# Altium PCB PCB1.PcbDoc (part 1 of 2)
Units mil, origin at the board's own origin, x right, y up, seen from the top; angles counter-clockwise.
Board outline 2920 x 2425 mil, 2 copper layers (Top Layer, Bottom Layer); 160 components, 43 nets, 660 pads, 172 vias.
Unrouted connection lines stored in the file: 5.
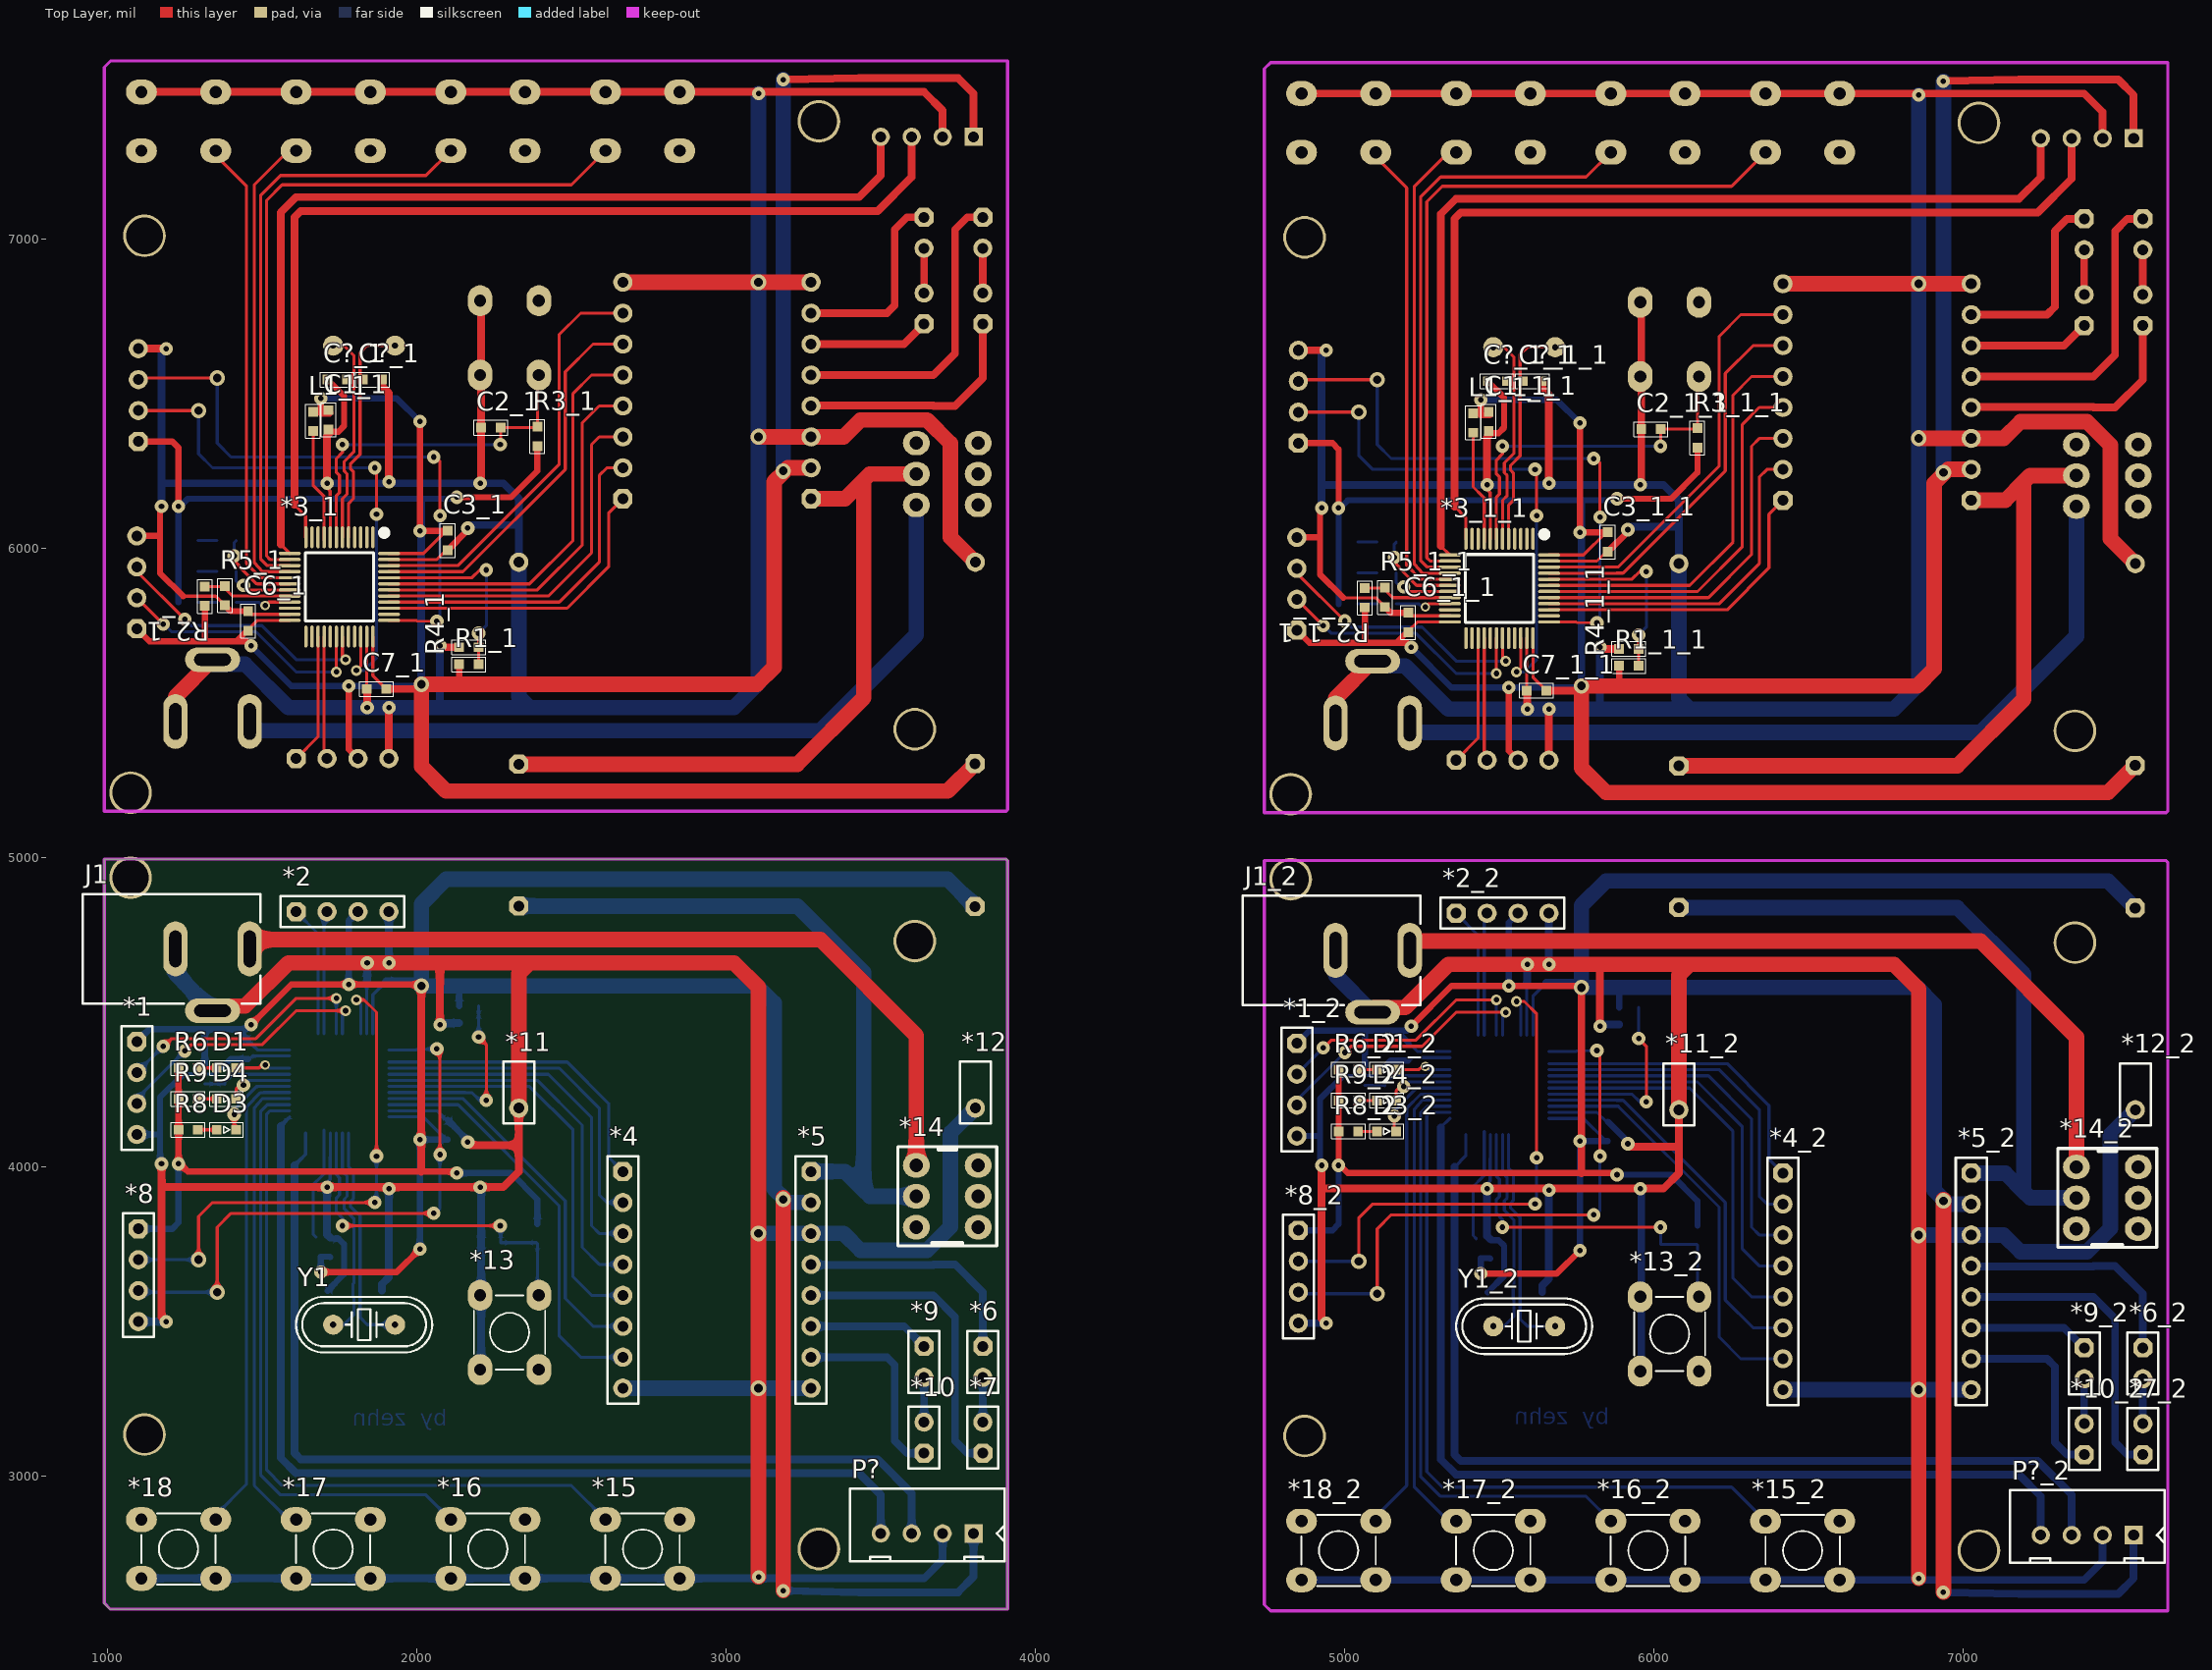
[diagram p0: Top Layer view]
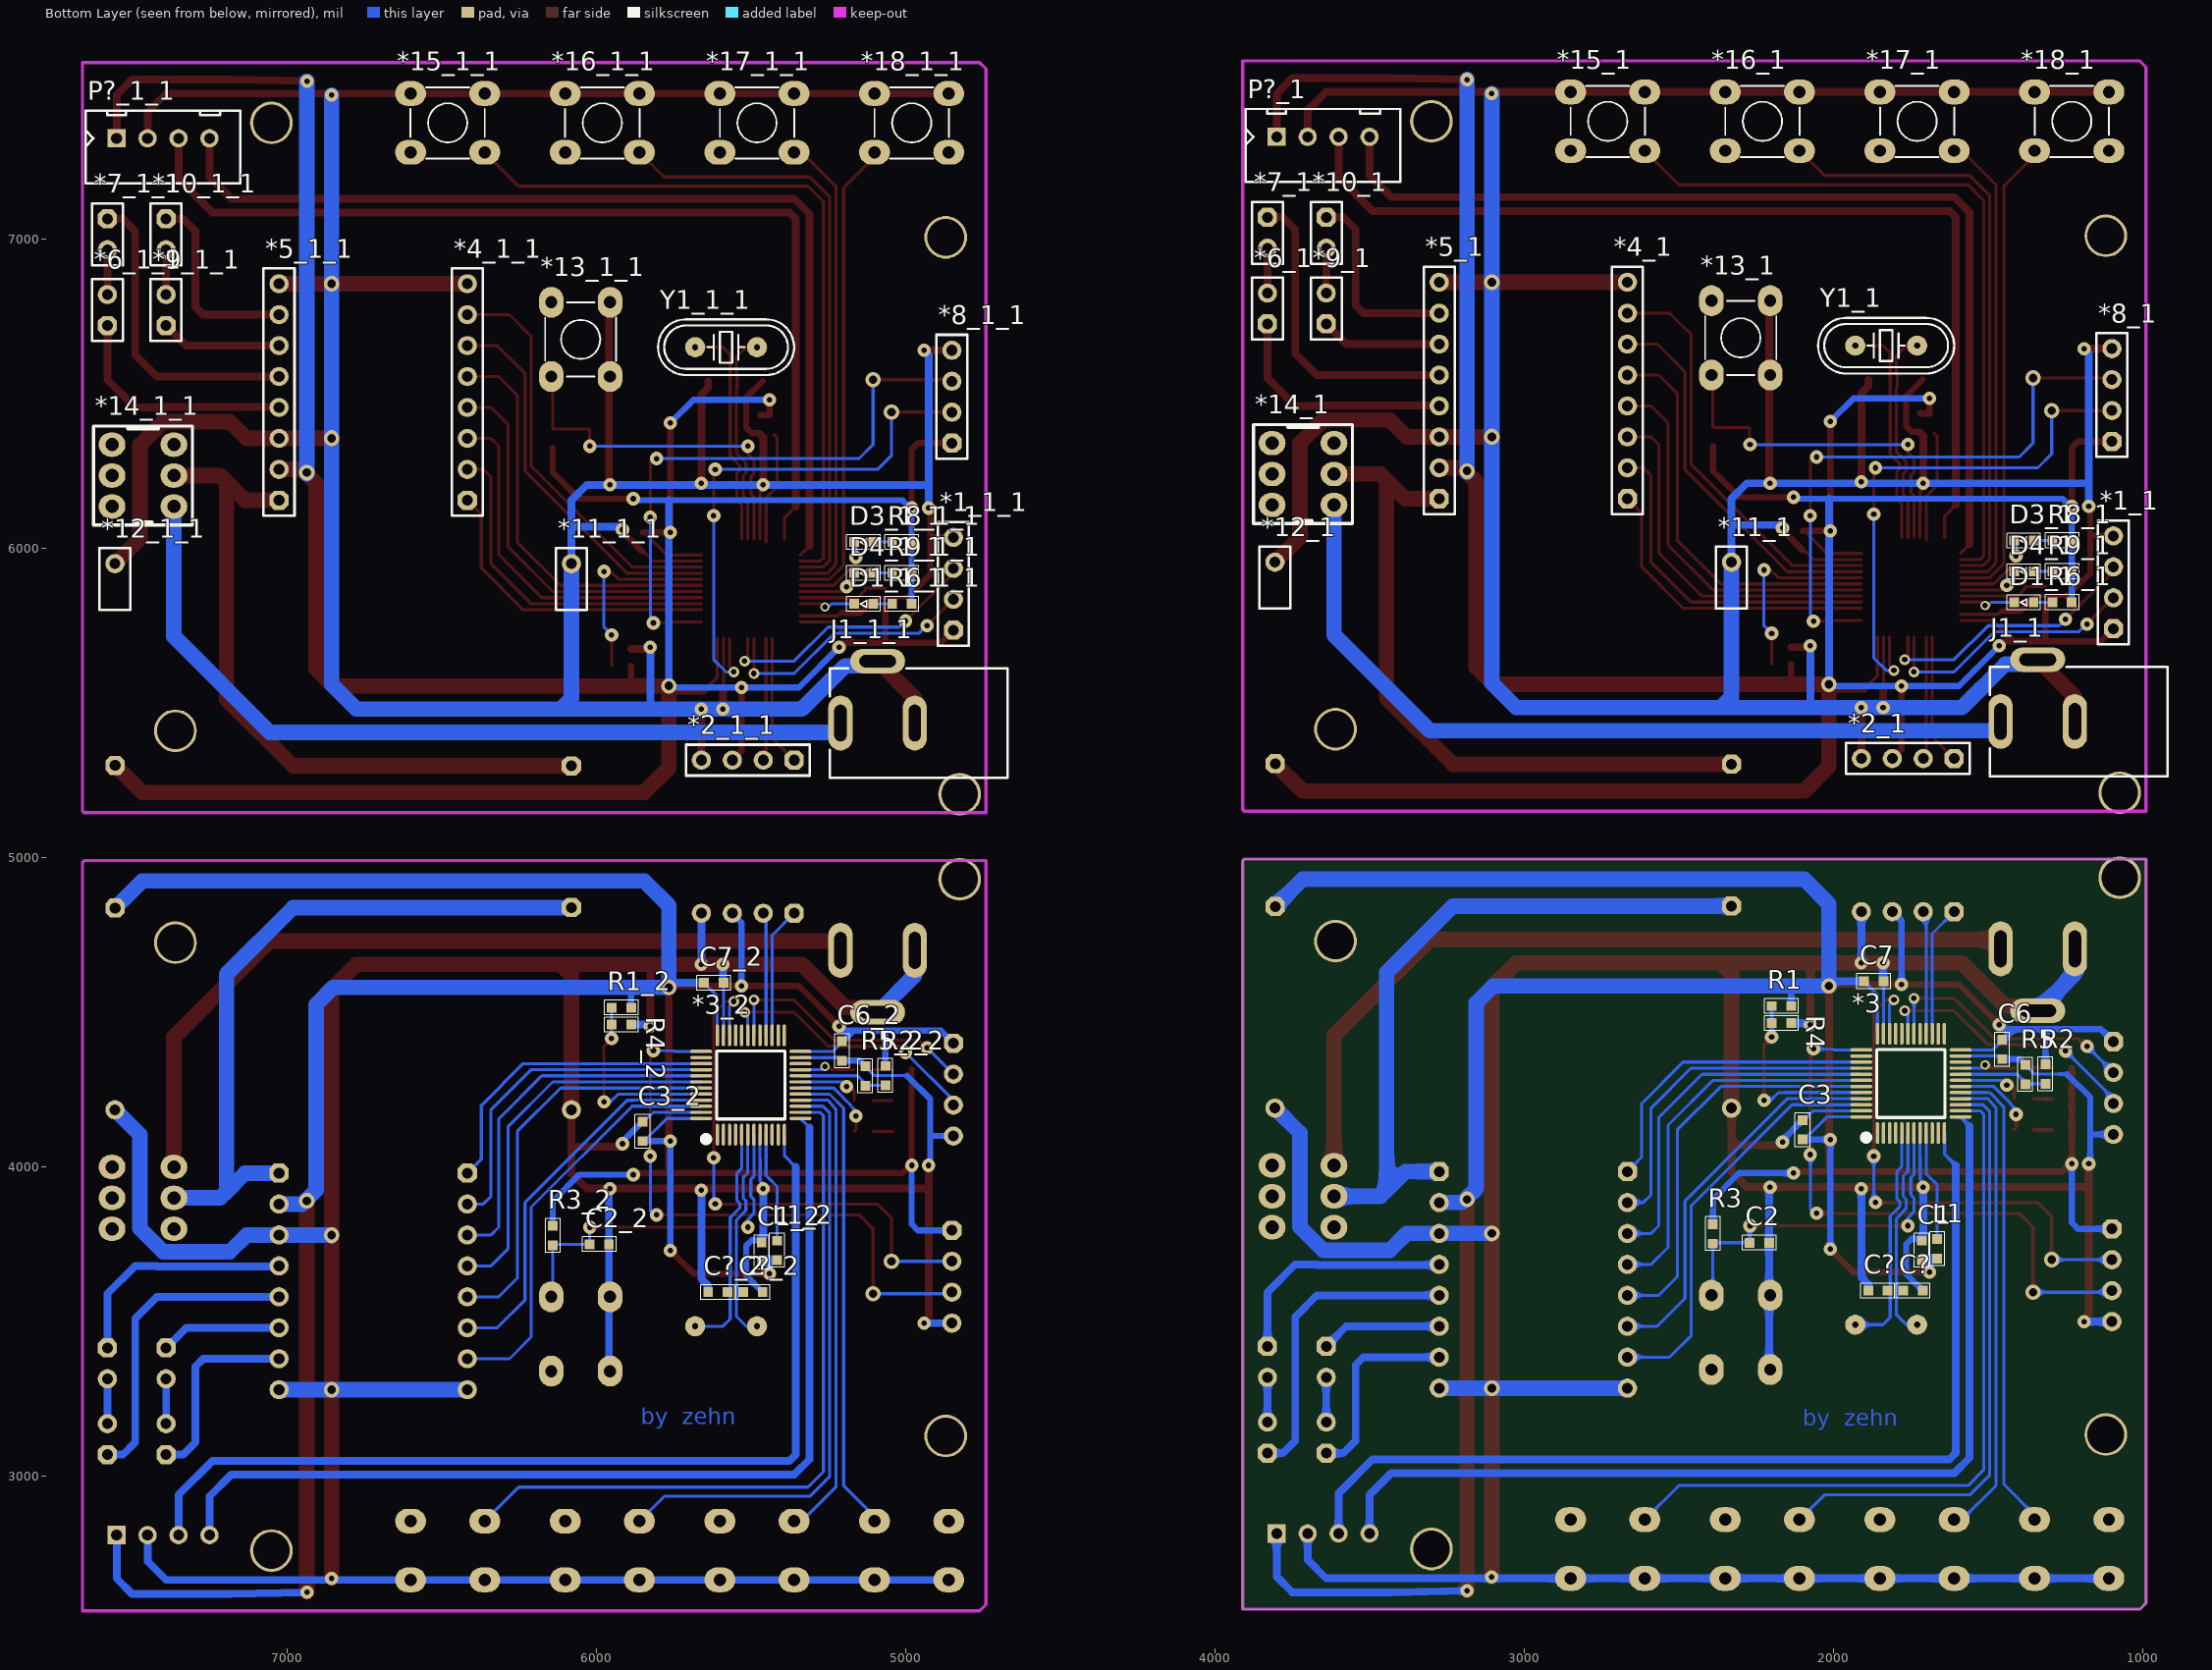
[diagram p1: Bottom Layer view, seen from below]

## Layer stack, top to bottom
Top Solder: solder mask 0.4, Solder Resist, Dk 3.5
Top Layer: signal copper 1.4
Dielectric 1: dielectric 12.6, FR-4, Dk 4.8
Bottom Layer: signal copper 1.4
Bottom Solder: solder mask 0.4, Solder Resist, Dk 3.5

## Board outline
1010,2570 990,2590 990,4995 3905,4995 3910,4990 3910,2570

## Design rules (kind name [scope] priority, off if disabled: settings)
Clearance [All] p1: gap=10 ignorepadtopadclearanceinfootprint=FALSE except(0: Arc-Hole Track-Hole SMDPad-Hole THPad-Hole Via-Hole Fill-Hole Poly-Hole Region-Hole Text-Hole)
PolygonConnect [All] p1: connectstyle=Relief reliefconductorwidth=10 reliefentries=4 polygonreliefangle="90 Angle" airgapwidth=10
RoutingVias [All] p1: holewidth=28 width=50 viastyle="Through Hole" minholewidth=28 minwidth=50 maxholewidth=28 maxwidth=50
SolderMaskExpansion [All] p1: expansion=4
Width [All] p1: maxlimit=50 minlimit=10 preferedwidth=25
30 further rules are at their usual default settings.

## Classes and differential pairs
component class Sheet1: *1 *2 *3 *4 *5 *6 *7 *8 *9 *10 *11 *12 *13 *14 *15 *16 *17 *18 C1 C2 C3 C6 C7 C? D1 D3 D4 J1 L1 P? R1 R2 R3 R4 R5 R6 R8 R9 Y1

## Components (designator, comment, footprint, x,y, rotation, side; value= is the part's Value field where it differs from the comment)
*1 "COM4-2.54" COM4-2.54 1095,4255 r270 top
*1_1 "COM4-2.54" COM4-2.54 1095,5890 r90 bottom (schematic designator *1)
*1_1_1 "COM4-2.54" COM4-2.54 4845,5885 r90 bottom (schematic designator *1)
*1_2 "COM4-2.54" COM4-2.54 4845,4250 r270 top (schematic designator *1)
*2 "COM4-2.54" COM4-2.54 1760,4825 r0 top
*2_1 "COM4-2.54" COM4-2.54 1760,5320 r0 bottom (schematic designator *2)
*2_1_1 "COM4-2.54" COM4-2.54 5510,5315 r0 bottom (schematic designator *2)
*2_2 "COM4-2.54" COM4-2.54 5510,4820 r0 top (schematic designator *2)
*3 "STM32FxxxC" LQFP48 1750,4270 r180 bottom
*3_1 "STM32FxxxC" LQFP48 1750,5875 r180 top (schematic designator *3)
*3_1_1 "STM32FxxxC" LQFP48 5500,5870 r180 top (schematic designator *3)
*3_2 "STM32FxxxC" LQFP48 5500,4265 r180 bottom (schematic designator *3)
*4 "COM8-2.54" COM8-2.54 2666.38,3635 r270 top
*4_1 "COM8-2.54" COM8-2.54 2666.38,6510 r90 bottom (schematic designator *4)
*4_1_1 "COM8-2.54" COM8-2.54 6416.38,6505 r90 bottom (schematic designator *4)
*4_2 "COM8-2.54" COM8-2.54 6416.38,3630 r270 top (schematic designator *4)
*5 "COM8-2.54" COM8-2.54 3275,3635 r270 top
*5_1 "COM8-2.54" COM8-2.54 3275,6510 r90 bottom (schematic designator *5)
*5_1_1 "COM8-2.54" COM8-2.54 7025,6505 r90 bottom (schematic designator *5)
*5_2 "COM8-2.54" COM8-2.54 7025,3630 r270 top (schematic designator *5)
*6 "COM2-2.54" COM2-2.54#1 3830,3370 r270 top
*6_1 "COM2-2.54" COM2-2.54#1 3830,6775 r90 bottom (schematic designator *6)
*6_1_1 "COM2-2.54" COM2-2.54#1 7580,6770 r90 bottom (schematic designator *6)
*6_2 "COM2-2.54" COM2-2.54#1 7580,3365 r270 top (schematic designator *6)
*7 "COM2-2.54" COM2-2.54#1 3830,3125 r90 top
*7_1 "COM2-2.54" COM2-2.54#1 3830,7020 r270 bottom (schematic designator *7)
*7_1_1 "COM2-2.54" COM2-2.54#1 7580,7015 r270 bottom (schematic designator *7)
*7_2 "COM2-2.54" COM2-2.54#1 7580,3120 r90 top (schematic designator *7)
*8 "COM4-2.54" COM4-2.54 1100,3650 r270 top
*8_1 "COM4-2.54" COM4-2.54 1100,6495 r90 bottom (schematic designator *8)
*8_1_1 "COM4-2.54" COM4-2.54 4850,6490 r90 bottom (schematic designator *8)
*8_2 "COM4-2.54" COM4-2.54 4850,3645 r270 top (schematic designator *8)
*9 "COM2-2.54" COM2-2.54#1 3640,3370 r270 top
*9_1 "COM2-2.54" COM2-2.54#1 3640,6775 r90 bottom (schematic designator *9)
*9_1_1 "COM2-2.54" COM2-2.54#1 7390,6770 r90 bottom (schematic designator *9)
*9_2 "COM2-2.54" COM2-2.54#1 7390,3365 r270 top (schematic designator *9)
*10 "COM2-2.54" COM2-2.54#1 3640,3125 r90 top
*10_1 "COM2-2.54" COM2-2.54#1 3640,7020 r270 bottom (schematic designator *10)
*10_1_1 "COM2-2.54" COM2-2.54#1 7390,7015 r270 bottom (schematic designator *10)
*10_2 "COM2-2.54" COM2-2.54#1 7390,3120 r90 top (schematic designator *10)
*11 "COM2-2.54" COM2-2.54#2 2330,4240 r270 top
*11_1 "COM2-2.54" COM2-2.54#2 2330,5905 r90 bottom (schematic designator *11)
*11_1_1 "COM2-2.54" COM2-2.54#2 6080,5900 r90 bottom (schematic designator *11)
*11_2 "COM2-2.54" COM2-2.54#2 6080,4235 r270 top (schematic designator *11)
*12 "COM2-2.54" COM2-2.54#3 3805.47,4240 r270 top
*12_1 "COM2-2.54" COM2-2.54#3 3805.47,5905 r90 bottom (schematic designator *12)
*12_1_1 "COM2-2.54" COM2-2.54#3 7555.47,5900 r90 bottom (schematic designator *12)
*12_2 "COM2-2.54" COM2-2.54#3 7555.47,4235 r270 top (schematic designator *12)
*13 "SW-PB" SW-PB1 2300,3465 r270 top
*13_1 "SW-PB" SW-PB1 2300,6680 r90 bottom (schematic designator *13)
*13_1_1 "SW-PB" SW-PB1 6050,6675 r90 bottom (schematic designator *13)
*13_2 "SW-PB" SW-PB1 6050,3460 r270 top (schematic designator *13)
*14 "SW-6" SW-6 3715,3905 r180 top
*14_1 "SW-6" SW-6 3715,6240 r180 bottom (schematic designator *14)
*14_1_1 "SW-6" SW-6 7465,6235 r180 bottom (schematic designator *14)
*14_2 "SW-6" SW-6 7465,3900 r180 top (schematic designator *14)
*15 "SW-PB" SW-PB1 2730,2765 r180 top
*15_1 "SW-PB" SW-PB1 2730,7380 r180 bottom (schematic designator *15)
*15_1_1 "SW-PB" SW-PB1 6480,7375 r180 bottom (schematic designator *15)
*15_2 "SW-PB" SW-PB1 6480,2760 r180 top (schematic designator *15)
*16 "SW-PB" SW-PB1 2230,2765 r180 top
*16_1 "SW-PB" SW-PB1 2230,7380 r180 bottom (schematic designator *16)
*16_1_1 "SW-PB" SW-PB1 5980,7375 r180 bottom (schematic designator *16)
*16_2 "SW-PB" SW-PB1 5980,2760 r180 top (schematic designator *16)
*17 "SW-PB" SW-PB1 1730,2765 r180 top
*17_1 "SW-PB" SW-PB1 1730,7380 r180 bottom (schematic designator *17)
*17_1_1 "SW-PB" SW-PB1 5480,7375 r180 bottom (schematic designator *17)
*17_2 "SW-PB" SW-PB1 5480,2760 r180 top (schematic designator *17)
*18 "SW-PB" SW-PB1 1230,2765 r180 top
*18_1 "SW-PB" SW-PB1 1230,7380 r180 bottom (schematic designator *18)
*18_1_1 "SW-PB" SW-PB1 4980,7375 r180 bottom (schematic designator *18)
*18_2 "SW-PB" SW-PB1 4980,2760 r180 top (schematic designator *18)
C1 "CAP" C_0603 1715,3730 r270 bottom
C1_1 "CAP" C_0603 1715,6415 r90 top (schematic designator C1)
C1_1_1 "CAP" C_0603 5465,6410 r90 top (schematic designator C1)
C1_2 "CAP" C_0603 5465,3725 r270 bottom (schematic designator C1)
C2 "CAP" C_0603 2240,3755 r180 bottom
C2_1 "CAP" C_0603 2240,6390 r180 top (schematic designator C2)
C2_1_1 "CAP" C_0603 5990,6385 r180 top (schematic designator C2)
C2_2 "CAP" C_0603 5990,3750 r180 bottom (schematic designator C2)
C3 "CAP" C_0603 2100,4120 r270 bottom
C3_1 "CAP" C_0603 2100,6025 r90 top (schematic designator C3)
C3_1_1 "CAP" C_0603 5850,6020 r90 top (schematic designator C3)
C3_2 "CAP" C_0603 5850,4115 r270 bottom (schematic designator C3)
C6 "CAP" C_0603 1455,4380 r90 bottom
C6_1 "CAP" C_0603 1455,5765 r270 top (schematic designator C6)
C6_1_1 "CAP" C_0603 5205,5760 r270 top (schematic designator C6)
C6_2 "CAP" C_0603 5205,4375 r90 bottom (schematic designator C6)
C7 "CAP" C_0603 1870,4600 r0 bottom
C7_1 "CAP" C_0603 1870,5545 r0 top (schematic designator C7)
C7_1_1 "CAP" C_0603 5620,5540 r0 top (schematic designator C7)
C7_2 "CAP" C_0603 5620,4595 r0 bottom (schematic designator C7)
C? "CAP" C_0603 1743.5,3600 r180 bottom
C? "CAP" C_0603 1856.5,3600 r0 bottom
C?_1 "CAP" C_0603 1856.5,6545 r0 top (schematic designator C?)
C?_1 "CAP" C_0603 1743.5,6545 r180 top (schematic designator C?)
C?_1_1 "CAP" C_0603 5493.5,6540 r180 top (schematic designator C?)
C?_1_1 "CAP" C_0603 5606.5,6540 r0 top (schematic designator C?)
C?_2 "CAP" C_0603 5606.5,3595 r0 bottom (schematic designator C?)
C?_2 "CAP" C_0603 5493.5,3595 r180 bottom (schematic designator C?)
D1 "LED" LED_0603 1385,4320 r0 top value=BLUE
D1_1 "LED" LED_0603 1385,5825 r0 bottom value=BLUE (schematic designator D1)
D1_1_1 "LED" LED_0603 5135,5820 r0 bottom value=BLUE (schematic designator D1)
D1_2 "LED" LED_0603 5135,4315 r0 top value=BLUE (schematic designator D1)
D3 "LED" LED_0603 1385,4120 r0 top value=BLUE
D3_1 "LED" LED_0603 1385,6025 r0 bottom value=BLUE (schematic designator D3)
D3_1_1 "LED" LED_0603 5135,6020 r0 bottom value=BLUE (schematic designator D3)
D3_2 "LED" LED_0603 5135,4115 r0 top value=BLUE (schematic designator D3)
D4 "LED" LED_0603 1385,4220 r0 top value=BLUE
D4_1 "LED" LED_0603 1385,5925 r0 bottom value=BLUE (schematic designator D4)
D4_1_1 "LED" LED_0603 5135,5920 r0 bottom value=BLUE (schematic designator D4)
D4_2 "LED" LED_0603 5135,4215 r0 top value=BLUE (schematic designator D4)
J1 "PWRCON" DC-005 1500,4705 r0 top
J1_1 "PWRCON" DC-005 1500,5440 r0 bottom (schematic designator J1)
J1_1_1 "PWRCON" DC-005 5250,5435 r0 bottom (schematic designator J1)
J1_2 "PWRCON" DC-005 5250,4700 r0 top (schematic designator J1)
L1 "L" L-0603 1665,3735 r270 bottom
L1_1 "L" L-0603 1665,6410 r90 top (schematic designator L1)
L1_1_1 "L" L-0603 5415,6405 r90 top (schematic designator L1)
L1_2 "L" L-0603 5415,3730 r270 bottom (schematic designator L1)
P? "Header 4" XH2.54-4P 3650,2815 r180 top
P?_1 "Header 4" XH2.54-4P 3650,7330 r180 bottom (schematic designator P?)
P?_1_1 "Header 4" XH2.54-4P 7400,7325 r180 bottom (schematic designator P?)
P?_2 "Header 4" XH2.54-4P 7400,2810 r180 top (schematic designator P?)
R1 "RES" R_0603 2168.5,4520 r180 bottom
R1_1 "RES" R_0603 2168.5,5625 r180 top (schematic designator R1)
R1_1_1 "RES" R_0603 5918.5,5620 r180 top (schematic designator R1)
R1_2 "RES" R_0603 5918.5,4515 r180 bottom (schematic designator R1)
R2 "RES" R_0603 1315,4300 r90 bottom
R2_1 "RES" R_0603 1315,5845 r270 top (schematic designator R2)
R2_1_1 "RES" R_0603 5065,5840 r270 top (schematic designator R2)
R2_2 "RES" R_0603 5065,4295 r90 bottom (schematic designator R2)
R3 "RES" R_0603 2390,3783.5 r90 bottom
R3_1 "RES" R_0603 2390,6361.5 r270 top (schematic designator R3)
R3_1_1 "RES" R_0603 6140,6356.5 r270 top (schematic designator R3)
R3_2 "RES" R_0603 6140,3778.5 r90 bottom (schematic designator R3)
R4 "RES" R_0603 2168.5,4465 r0 bottom
R4_1 "RES" R_0603 2168.5,5680 r0 top (schematic designator R4)
R4_1_1 "RES" R_0603 5918.5,5675 r0 top (schematic designator R4)
R4_2 "RES" R_0603 5918.5,4460 r0 bottom (schematic designator R4)
R5 "RES" R_0603 1380,4298.5 r270 bottom
R5_1 "RES" R_0603 1380,5846.5 r90 top (schematic designator R5)
R5_1_1 "RES" R_0603 5130,5841.5 r90 top (schematic designator R5)
R5_2 "RES" R_0603 5130,4293.5 r270 bottom (schematic designator R5)
R6 "RES" R_0603 1261.5,4320 r180 top
R6_1 "RES" R_0603 1261.5,5825 r180 bottom (schematic designator R6)
R6_1_1 "RES" R_0603 5011.5,5820 r180 bottom (schematic designator R6)
R6_2 "RES" R_0603 5011.5,4315 r180 top (schematic designator R6)
R8 "RES" R_0603 1261.5,4120 r180 top
R8_1 "RES" R_0603 1261.5,6025 r180 bottom (schematic designator R8)
R8_1_1 "RES" R_0603 5011.5,6020 r180 bottom (schematic designator R8)
R8_2 "RES" R_0603 5011.5,4115 r180 top (schematic designator R8)
R9 "RES" R_0603 1261.5,4220 r180 top
R9_1 "RES" R_0603 1261.5,5925 r180 bottom (schematic designator R9)
R9_1_1 "RES" R_0603 5011.5,5920 r180 bottom (schematic designator R9)
R9_2 "RES" R_0603 5011.5,4215 r180 top (schematic designator R9)
Y1 "XTAL_49US" XTAL_DIP 1830,3490 r0 top value=12MHz
Y1_1 "XTAL_49US" XTAL_DIP 1830,6655 r0 bottom value=12MHz (schematic designator Y1)
Y1_1_1 "XTAL_49US" XTAL_DIP 5580,6650 r0 bottom value=12MHz (schematic designator Y1)
Y1_2 "XTAL_49US" XTAL_DIP 5580,3485 r0 top value=12MHz (schematic designator Y1)

## Footprints (in the part's own frame and the unit in brackets; to place one, negate y for a bottom-side part, rotate by r counter-clockwise, add the part's x,y. Pads: shape width x height; smd on the part's side, far side on the other; paste and mask are expansions set on the pad)
C_0603 [mm]
  rect 0.8x0.8 smd: 1(-0.8,0) 2(0.8,0)
  silkscreen extent -1.38,-0.61 1.4,0.61, body extent -0.79,-0.38 0.81,0.42, height 0.5
COM2-2.54#1 [mil]
  oct 62x62 hole 35: 1(-50,0)
  round 62 hole 35: 2(50,0)
  silkscreen extent -100,-50 100,50, body extent -100,-50 100,50, height 336
COM2-2.54#2 [mil]
  oct 62x62 hole 35: 1(-603.31,0)
  round 62 hole 35: 2(50,0)
  silkscreen extent -100,-50 100,50, body extent -100,-50 100,50, height 336
COM2-2.54#3 [mil]
  oct 62x62 hole 35: 1(-601.73,-0.47)
  round 62 hole 35: 2(50,0)
  silkscreen extent -100,-50 100,50, body extent -100,-50 100,50, height 336
COM4-2.54 [mil]
  oct 62x62 hole 35: 1(-150,0)
  round 62 hole 35: 2(-50,0) 3(50,0) 4(150,0)
  silkscreen extent -200,-50 200,50, body extent -200,-50 200,50, height 398
COM8-2.54 [mil]
  oct 62x62 hole 35: 1(-350,0)
  round 62 hole 35: 2(-250,0) 3(-150,0) 4(-50,0) 5(50,0) 6(150,0) 7(250,0) 8(350,0)
  silkscreen extent -400,-50 400,50, body extent -400,-50 400,50, height 398
DC-005 [mm] "DC电源插座"
  oval 2x4.5 hole 1 slot 3 at 90 deg: 1(-1.016,0) 2(-7.112,0)
  oval 4.5x2 hole 1 slot 3 at 0 deg: 3(-4.064,-5.08)
  silkscreen extent -14.73,-4.5 -0.13,4.5, body extent -14.59,-5.01 -0.76,4.5, height 11.02
L-0603 [mm]
  rect 0.8x0.8 smd: 1(-0.8,0) 2(0.8,0)
  silkscreen extent -1.38,-0.61 1.4,0.61, body extent -0.79,-0.48 0.81,0.47, height 0.78
LED_0603 [mm]
  rect 0.8x0.8 smd: 1(-0.8,0) 2(0.8,0)
  silkscreen extent -1.38,-0.6 1.39,0.61, body extent -0.8,-0.4 0.82,0.4, height 0.6
LQFP48 [mm]
  oval 0.279x1.8 smd: 1(-2.75,-4.075) 2(-2.25,-4.075) 3(-1.75,-4.075) 4(-1.25,-4.075) 5(-0.75,-4.075) 6(-0.25,-4.075) 7(0.25,-4.075) 8(0.75,-4.075) 9(1.25,-4.075) 10(1.75,-4.075) 11(2.25,-4.075) 12(2.75,-4.075) 25(2.75,4.075) 26(2.25,4.075) 27(1.75,4.075) 28(1.25,4.075) 29(0.75,4.075) 30(0.25,4.075) 31(-0.25,4.075) 32(-0.75,4.075) 33(-1.25,4.075) 34(-1.75,4.075) 35(-2.25,4.075) 36(-2.75,4.075)
  oval 1.8x0.279 smd: 13(4.075,-2.75) 14(4.075,-2.25) 15(4.075,-1.75) 16(4.075,-1.25) 17(4.075,-0.75) 18(4.075,-0.25) 19(4.075,0.25) 20(4.075,0.75) 21(4.075,1.25) 22(4.075,1.75) 23(4.075,2.25) 24(4.075,2.75) 37(-4.075,2.75) 38(-4.075,2.25) 39(-4.075,1.75) 40(-4.075,1.25) 41(-4.075,0.75) 42(-4.075,0.25) 43(-4.075,-0.25) 44(-4.075,-0.75) 45(-4.075,-1.25) 46(-4.075,-1.75) 47(-4.075,-2.25) 48(-4.075,-2.75)
  silkscreen extent -3.93,-4.69 2.79,2.79, body extent -4.49,-4.45 4.51,4.55, height 1.56
R_0603 [mm]
  rect 0.8x0.8 smd: 1(-0.8,0) 2(0.8,0)
  silkscreen extent -1.38,-0.61 1.4,0.61, body extent -0.81,-0.42 0.83,0.43, height 0.46
SW-6 [mm]
  oval 2.2x2 hole 1.1: 1(-2.54,2.54) 2(-2.54,0) 3(-2.54,-2.54) 4(2.54,2.54) 5(2.54,0) 6(2.54,-2.54)
  silkscreen extent -4.06,-4.06 4.06,4.06, body extent -3.38,-3.41 3.62,3.59, height 13
SW-PB1 [mil]
  oval 100x80 hole 39.37: 1(-120,95) 1(120,95) 2(-120,-95) 2(120,-95)
  silkscreen extent -120,-115 120,115, body extent -157,-116 155,128, height 185
XH2.54-4P [mm] "XH2.54端子直针"
  rect 1.5x1.5 hole 0.9: 1(-3.81,0)
  round 1.5 hole 0.9: 2(-1.27,0) 3(1.27,0) 4(3.81,0)
  silkscreen extent -6.35,-3.68 6.35,2.29, body extent -6.22,-3.49 6.22,2.22, height 1.5
XTAL_DIP [mil]
  round 65 hole 20: 1(-100,0) 2(100,0)
  silkscreen extent -220,-90 220,90, body extent -210,-60 210,60, height 122

## Part data
J1 J1_1 J1_1_1 J1_2: "直流电源端子", ComponentLink1Description="Manufacturer Link", ComponentLink1URL=http://domino.kycon.com/internet/Products.html, DatasheetDocument=09-May-2002, Published=17-Dec-2003, Publisher="Altium Limited"
P? P?_1 P?_1_1 P?_2: "接插件", LatestRevisionDate=17-Jul-2002, LatestRevisionNote="Re-released for DXP Platform.", Publisher="Altium Limited"
D1 D1_1 D1_1_1 D1_2 D3 D3_1 D3_1_1 D3_2 D4 D4_1 D4_1_1 D4_2: PCB DECAL=LED_0603
Y1 Y1_1 Y1_1_1 Y1_2: PCB DECAL=XTAL_SMD

## Free pads (board coordinates)
  round 137.8 hole 118.11: 2(1075,4935) 2(1075,5210) 2(1120,3135) 2(1120,7010) 2(3300,2765) 2(3300,7380) 2(3610,4730) 2(3610,5415) 2(4825,4930) 2(4825,5205) 2(4870,3130) 2(4870,7005) 2(7050,2760) 2(7050,7375) 2(7360,4725) 2(7360,5410)

## Via types
v1: diameter 43.31, hole 17.72, Top Layer to Bottom Layer, 132 vias
v2: diameter 50, hole 28, Top Layer to Bottom Layer, 24 vias
v3: diameter 35.43, hole 17.72, Top Layer to Bottom Layer, 12 vias
v4: diameter 30.87, hole 17.72, Top Layer to Bottom Layer, 4 vias

## Nets (pads, with @x,y where several pads share a name; then routed paths per layer and width w, separated by ;. In a path a pad name is that pad's centre, name@x,y a point inside that pad or via, vN(x,y) a via of type N, cw(c..) or ccw(c..) an arc to the next point about the centre after c; other vN are vias at no path point)
3.3v: *1.1 *2.3 *3.24 *3.36 *3.48 *5.2 *8.1 *12.1 C1.2 C3.2 C6.2 C7.2 L1.2 P?.1 R1.2 R2.2 R3.2 R6.2 R8.2 R9.2 | length 11604.8
  Top Layer w20: R6.2@1230,4320 R9.2@1230,4220 R8.2@1230,4120 1230,4015 1260,3985 2015,3985 2125,3985 v1(2130,3980) ; v1(1465,4460) 1595,4590 v1(1780,4590) 2010,4590 v2(2015,4585) ; v1(1690,3660) 1935,3660 v1(2010,3735)
  Top Layer w25: 2015,3985 v2(2015,4585)
  Top Layer w50: v1(3185,2630) v1(3185,3900)
  Bottom Layer w10: C6.2@1455,4407.99 1484.72,4378.27 *3.24@1589.55,4378.27 ; *3.36@1858.27,4430.45 1858.27,4556.77 C7.2@1901.5,4600 ; *3.48@1910.45,4161.73 2021.77,4161.73 C3.2@2095,4088.5
  Bottom Layer w20: *1.1@1095,4405 1135.63,4445.63 1315,4445.63 ; *8.1@1100,3800 1210,3800 1230,3820 v1(1230,4010) ; R2.2@1315,4331.5 1315,4445.63 ; C6.2@1455,4407.99 1417.36,4445.63 ; v1(1465,4460) 1450.63,4445.63 1417.36,4445.63 ; v1(1690,3660) 1690,3710 1718.5,3710 C1.2@1720,3708.5 ; v1(1780,4590) 1780,4795 *2.3@1810,4825 ; v1(2010,3735) v1(2010,4088.5) 2095,4088.5 C3.2@2100,4088.5 ; 2125,4585 2137.01,4572.99 R1.2@2137.01,4520 ; v1(2130,3980) 2305,3980 2390,3895 R3.2@2390,3815 ; 1315,4445.63 1417.36,4445.63
  Bottom Layer w25: C7.2@1901.5,4600 2000,4600 v2(2015,4585) ; v1(3185,2630) 3430,2625 3750,2625 3800,2675 P?.1@3800,2815
  Bottom Layer w50: v2@3187.5,3897.5 3155,3930 3155,4530 3100,4585 2125,4585 v2(2015,4585) 2015,4850 2095,4930 3716.73,4930 *12.1@3805,4841.73 ; v2@3200,3885 *5.2@3275,3885
  other v2: 3185,3895
12v: *5.1 *11.1 *14.5 | length 2280.5
  Bottom Layer w50: *11.1@2330,4843.31 3230,4843.31 3445,4628.31 3445,3925 ; *5.1@3275,3985 3385,3985 3445,3925 ; *14.5@3615,3905 3465,3905 3445,3925
AIN1: *3.41 *4.3 | length 1174.1
  Bottom Layer w10: *3.41@1910.45,4299.53 2425.47,4299.53 2565,4160 2565,3810 2590,3785 *4.3@2666.38,3785
AIN2: *3.40 *4.2 | length 1099.8
  Bottom Layer w10: *3.40@1910.45,4319.21 2460.79,4319.21 2590,4190 2590,3910 2615,3885 *4.2@2666.38,3885
AO1: *5.4 *6.1 | length 768.8
  Bottom Layer w25: *5.4@3275,3685 3276.87,3683.13 3669.42,3683.13 3671.29,3685 3740,3685 3830,3595 *6.1@3830,3420
AO2: *5.5 *7.1 | length 1000.6
  Bottom Layer w25: *5.5@3275,3585 3670,3585 3740,3515 3740,3115 3780,3075 *7.1@3830,3075
BIN1: *3.43 *4.5 | length 1313.8
  Bottom Layer w10: *3.43@1910.45,4260.16 2364.84,4260.16 2505,4120 2505,3645 2565,3585 *4.5@2666.38,3585
BIN2: *3.45 *4.6 | length 1245.1
  Bottom Layer w10: *3.45@1910.45,4220.79 2129.21,4220.79 ; 2129.21,4220.47 2148.68,4220.47 2149.16,4220 2150,4220 2480,3890 2480,3575 2570,3485 *4.6@2666.38,3485
BO1: *5.6 *9.1 | length 391.9
  Bottom Layer w25: *5.6@3275,3485 3575,3485 *9.1@3640,3420
BO2: *5.7 *10.1 | length 636.9
  Bottom Layer w25: *5.7@3275,3385 3520,3385 3545,3360 3545,3115 3585,3075 *10.1@3640,3075
boot0: *3.44 R1.1 R4.2 | length 645.5
  Top Layer w10: v1@2200,4425 v1(2200,4420) 2225,4395 v1(2225,4215)
  Bottom Layer w10: *3.44@1910.45,4240.47 2156.97,4240.47 2157.44,4240 2178.5,4240 2203.5,4215 v1(2225,4215) ; v1(2200,4420) R4.2@2200,4465 R1.1@2200,4520
boot1: *3.20 R2.1 R5.2 | length 293.7
  Bottom Layer w10: R2.1@1315,4268.5 1378.5,4268.5 R5.2@1380,4267.01 1380,4275 1405,4300 1405.47,4299.53 *3.20@1589.55,4299.53
GND: *1.4 *2.4 *3.8 *3.23 *3.35 *3.47 *4.8 *5.3 *5.8 *8.4 *11.2 *12.2 *13.2 *15.1 *16.1 *17.1 *18.1 C1.1 C2.2 C3.1 C6.1 C7.1 C?.2 J1.2 J1.3 P?.2 R4.1 R5.1 | length 14281.2
  Top Layer w25: v1(1175,4010) 1175,3940 ; v1(1190,3500) 1175,3515 1175,3940 ; v1(2075,4460) 2075,4660 ; v1(2165,4080) 2175,4070 2330,4070 ; *11.2@2330,4190 2330,4070 ; 1175,3940 1180,3935 v1(1710,3935) v1(2205,3935) 2280,3935 2330,3985 2330,4070
  Top Layer w50: J1.3@1340,4505 1340,4515 1345,4520 1444.88,4520 1584.88,4660 v1(1840,4660) v1(1910,4660) 2075,4660 2365,4660 ; *11.2@2330,4190 2330,4625 2365,4660 ; v1(3105,2675) v2(3105,3285) v1(3105,3780) v2(3105,3785) 3105,4580 3025,4660 2405,4660 2365,4660
  Bottom Layer w10: 1245,4300 1350,4300 R5.1@1380,4330 ; C6.1@1455,4345 1468.58,4358.58 *3.23@1589.55,4358.58 ; v1(1710,3935) 1710,3950 1710.05,3950.05 1719.98,3959.92 *3.8@1720.47,4109.55 ; C7.1@1838.5,4600 1838.58,4599.92 *3.35@1838.58,4430.45 ; *3.47@1910.45,4181.42 2065.08,4181.42 C3.1@2095,4151.5
  Bottom Layer w20: *1.4@1095,4105 1165,4105 1170,4100 ; v1@1170,4010 1170,4100 ; 1245,4300 1170,4225 1170,4100 ; R5.1@1380,4330 1398.5,4348.5 C6.1@1455,4348.5 ; C?.2@1712.01,3600 1765,3652.99 1765,3750 1746.65,3768.35 1723.15,3768.35 C1.1@1720,3771.5 ; C3.1@2100,4151.5 2166.5,4085 v1(2165,4080)
  Bottom Layer w25: *8.4@1100,3500 v1(1190,3500) ; *18.1@1110,2670 *18.1@1350,2670 *17.1@1610,2670 *17.1@1850,2670 *16.1@2110,2670 *16.1@2350,2670 *15.1@2610,2670 *15.1@2850,2670 3640,2670 3700,2730 P?.2@3700,2815 ; v1(1710,3935) 1710,3781.5 C1.1@1720,3771.5 ; C7.1@1838.5,4600 1840,4601.5 v1(1840,4660) ; C?.2@1887.99,3600 1887.99,3621.5 1910,3643.5 v1(1910,3930) ; v1@1910,4665 *2.4@1910,4825 ; v1@2075,4465 R4.1@2137.01,4465 ; *13.2@2205,3345 2208.5,3348.5 C2.2@2208.5,3755 v1@2208.5,3931.5
  Bottom Layer w50: J1.2@1220,4705 1220,4625 J1.3@1340,4505 ; *4.8@2666.38,3285 v2(3105,3285) *5.8@3275,3285 ; v2(3105,3785) *5.3@3275,3785 3380,3785 3434.37,3730.63 3649.74,3730.63 3725,3805.89 3725,4109.53 *12.2@3805.47,4190
hoer1: *3.13 P?.4 | length 3228.7
  Bottom Layer w10: 1560,4132.18 *3.13@1589.55,4161.73
  Bottom Layer w25: 1560,4132.18 1560,3060 1610,3010 3430,3010 3500,2940 P?.4@3500,2815
hoer2: *3.12 P?.3 | length 3228.3
  Bottom Layer w10: 1605,4005 1640.92,4040.92 *3.12@1640.92,4109.55
  Bottom Layer w25: 1605,4005 1605,3075 1625,3055 3490,3055 3600,2945 P?.3@3600,2815
LED1: *3.21 D1.2 | length 171.7
  Top Layer w10: D1.2@1416.5,4320 1490,4320 v4@1500,4330
  Bottom Layer w10: v4(1510,4330) 1520.79,4319.21 *3.21@1589.55,4319.21
LED2: *3.22
LED3: *3.18 D3.2 | length 288
  Top Layer w10: D3.2@1416.5,4120 1410,4126.5 v1(1410,4170) 1412.5,4170 v1@1416.5,4174
  Bottom Layer w10: v1(1410,4170) 1410,4185 1416.5,4191.5 1426.9,4201.9 1426.9,4204.57 1482.18,4259.84 1485.16,4259.84 ; 1485.16,4260.16 *3.18@1589.55,4260.16
LED4: *3.19 D4.2 | length 206.3
  Top Layer w10: D4.2@1416.5,4220 1416.5,4251.5 v1@1430,4265
  Bottom Layer w10: v1(1440,4265) 1454.84,4279.84 *3.19@1589.55,4279.84
Net*3_9: *3.9 L1.1 | length 364.8
  Bottom Layer w10: L1.1@1675,3772.99 1665,3782.99 1665,3941.84 1694.82,3971.65 1694.94,3971.65 1698.28,3975 1700.79,3977.5 *3.9@1700.79,4109.55 *3.9@1700.79,4118.76
Net*6_2: *6.2 *7.2 | length 145
  Bottom Layer w25: *7.2@3830,3175 *6.2@3830,3320
Net*9_2: *9.2 *10.2 | length 145
  Bottom Layer w25: *10.2@3640,3175 *9.2@3640,3320
Net*14_6: *14.6 J1.1 | length 2715.8
  Top Layer w50: J1.1@1460,4705 1490,4735 3305,4735 3615,4425 *14.6@3615,4005
NetD1_1: D1.1 R6.1 | length 60.5
  Top Layer w10: R6.1@1292.99,4320 D1.1@1353.5,4320
NetD2_1: 
NetD3_1: D3.1 R8.1 | length 60.5
  Top Layer w10: R8.1@1292.99,4120 D3.1@1353.5,4120
NetD4_1: D4.1 R9.1 | length 60.5
  Top Layer w10: R9.1@1292.99,4220 D4.1@1353.5,4220
NRST: *3.7 *13.1 C2.1 R3.1 | length 1170.4
  Top Layer w10: v1(1760,3810) v1(2270,3810)
  Bottom Layer w10: *3.7@1740.16,4109.55 1740.16,3974.84 1750,3965 1750,3909.84 1740.16,3900 1740.16,3854.84 1760,3835 v1(1760,3810) ; v1(2270,3810) 2271.5,3808.5 C2.1@2271.5,3755 2387.01,3755 R3.1@2390,3752.01 2390,3590 *13.1@2395,3585
OSC_IN: *3.5 C?.1@1825,3600 Y1.2 | length 742.2
  Bottom Layer w10: 1779.53,4000.47 *3.5@1779.53,4109.55 ; 1779.84,4000.47 1779.84,4000.16 1795,3985 1795,3896.72 1785.7,3887.42 1785.7,3872.58 1816.65,3841.63 1816.65,3513.35 1840,3490 Y1.2@1930,3490
OSC_OUT: *3.6 C?.1@1775,3600 Y1.1 | length 692.5
  Bottom Layer w10: Y1.1@1730,3490 1765,3490 1796.65,3521.65 1796.65,3575.64 1794.25,3578.04 1794.25,3589.02 1794.25,3621.96 1796.65,3624.36 1796.65,3833.35 1765.7,3864.3 1765.7,3895.7 1775,3905 1775,3970 1760.16,3984.84 1760.16,3985.16 ; 1759.84,3985.16 *3.6@1759.84,4109.55
PWMA: *3.39 *4.1 | length 1004.2
  Bottom Layer w10: *3.39@1910.45,4338.9 2486.1,4338.9 2620,4205 2621.1,4203.9 2621.1,4030.28 *4.1@2666.38,3985
PWMB: *3.46 *4.7 | length 1339.7
  Bottom Layer w10: *3.46@1910.45,4201.1 2133.9,4201.1 ; 2133.9,4200.47 2134.53,4200.47 2460,3875 2460,3455 2530,3385 *4.7@2666.38,3385
RX: *1.3 *3.31 | length 886.8
  Top Layer w10: v1(1250,4375) 1270,4395 1500,4395 1610,4505 v3(1770,4505)
  Bottom Layer w10: *1.3@1095,4205 1095,4220 v1(1250,4375) ; *3.31@1759.84,4430.45 1759.84,4494.84 v3(1770,4505)
SCL: *2.2 *3.28 | length 398.4
  Bottom Layer w10: *3.28@1700.79,4430.45 1700.79,4815.79 *2.2@1710,4825
SDA: *2.1 *3.27 | length 424
  Bottom Layer w10: *2.1@1610,4825 1681.1,4753.9 *3.27@1681.1,4430.45
STBY: *3.42 *4.4 | length 1233.7
  Bottom Layer w10: *3.42@1910.45,4279.84 2390.16,4279.84 2535,4135 2535,3740 2590,3685 *4.4@2666.38,3685
SW1: *3.14 *15.2 | length 2390.9
  Bottom Layer w10: 1526.42,4181.1 1525.33,4181.1 1515,4170.77 1515,3020 1565,2970 2500,2970 *15.2@2610,2860 ; 1526.42,4181.42 *3.14@1589.55,4181.42
SW2: *3.15 *16.2 | length 1952.8
  Bottom Layer w10: *3.15@1589.55,4201.1 1517.05,4201.1 1495,4179.05 1495,3005 1560,2940 2030,2940 *16.2@2110,2860
SW3: *3.16 *17.2 | length 1529.9
  Bottom Layer w10: *3.16@1589.55,4220.79 1500.79,4220.79 1475,4191.72 1475,2970 1585,2860 *17.2@1610,2860
SW4: *3.17 *18.2 | length 1534.7
  Bottom Layer w10: *18.2@1350,2860 1350,2875 1450,2975 1450,4195 1495.16,4240.16 1505.47,4240.16 ; 1505.47,4240.47 *3.17@1589.55,4240.47
SWCLK: *3.37 *8.3 | length 1887.8
  Top Layer w10: v2(1355,3595) 1355,3805 1400,3850 v1(2055,3850) ; v1(2065.08,4381.42) 2075,4371.5 v1(2075,4040)
  Bottom Layer w10: *8.3@1100,3600 1105,3595 v2(1355,3595) ; *3.37@1910.45,4378.27 1998.27,4378.27 2000,4380 v1(2065.08,4381.42) ; v1(2055,3850) 2060,3850 2075,3865 v1(2075,4040)
SWDIO: *3.34 *8.2 | length 1737.6
  Top Layer w10: v2(1295,3700) 1295,3840 1340,3885 v1(1865,3885) ; v3(1805,4540) 1830,4540 1870,4500 v1(1870,4035)
  Bottom Layer w10: *8.2@1100,3700 v2(1295,3700) ; v3(1805,4540) 1818.9,4526.1 *3.34@1818.9,4430.45 ; v1(1865,3885) 1870,3890 v1(1870,4035)
TX: *1.2 *3.30 | length 859.1
  Top Layer w10: v1(1180,4390) 1182.5,4390 1207.5,4415 1480,4415 1610,4545 v3(1740.16,4545)
  Bottom Layer w10: *1.2@1095,4305 v1(1180,4390) ; *3.30@1740.16,4430.45 v3(1740.16,4545)